# Altium PCB PCB_Altium_OpenComs_ABP1_Back-panel_Jacks_2023-05-12.pcbdoc
Units mm, origin at the board's own origin, x right, y up, seen from the top; angles counter-clockwise.
Board outline 48.96 x 57.85 mm, 2 copper layers (Top Layer, Bottom Layer); 2 components, 11 nets, 20 pads, 4 vias.
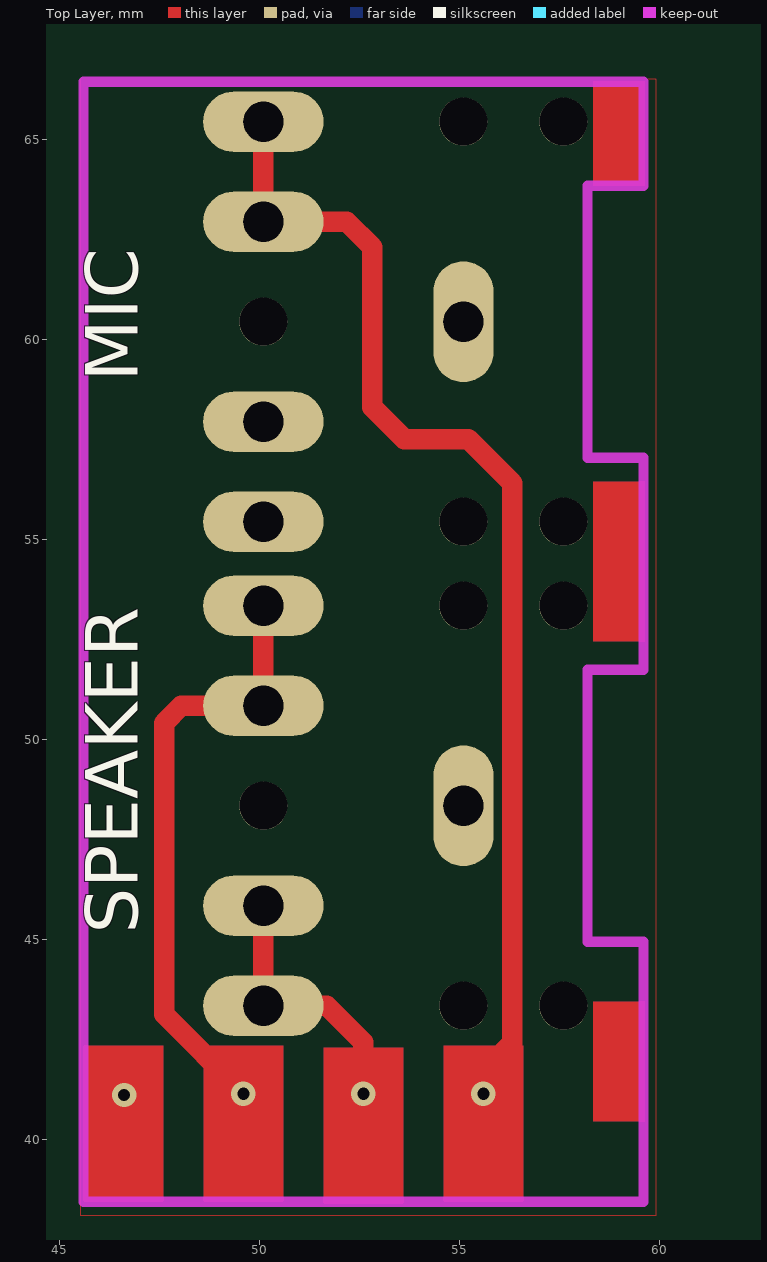
[diagram p0: Top Layer view]
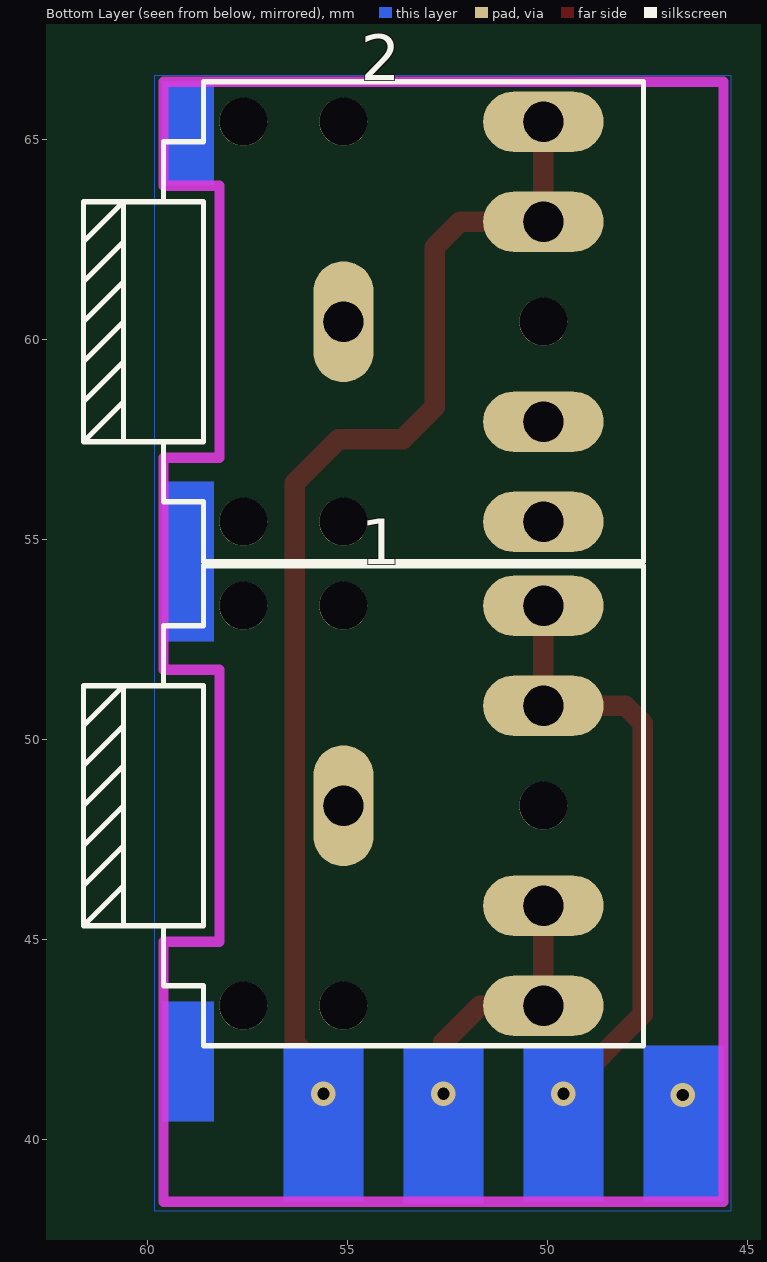
[diagram p1: Bottom Layer view, seen from below]

## Layer stack, top to bottom
Top Layer: signal copper (thickness not stored)
Dielectric: dielectric 0.32, FR-4, Dk 4.8
Bottom Layer: signal copper (thickness not stored)

## Board outline
74.364,25.4 25.4,25.4 25.4,83.249 74.364,83.249

## Components (designator, comment, footprint, x,y, rotation, side; value= is the part's Value field where it differs from the comment)
1 "FC68131" FC68131-5P 50.1,48.333 r0 bottom
2 "FC68131" FC68131-5P 50.1,60.433 r0 bottom

## Footprints (in the part's own frame and the unit in brackets; to place one, negate y for a bottom-side part, rotate by r counter-clockwise, add the part's x,y. Pads: shape width x height; smd on the part's side, far side on the other; paste and mask are expansions set on the pad)
FC68131-5P [mm]
  oval 1.508x3.016 hole 1: 1(5,0)
  oval 3.016x1.508 hole 1: 2(0,5) 3(0,2.5) 4(0,-2.5) 5(0,-5)
  round 1.2 hole 1.2 unplated: ""(0,0) ""(5,-5) ""(5,5) ""(7.5,-5) ""(7.5,5)
  silkscreen extent -2.5,-6 11.5,6

## Via types
v1: diameter 0.61, hole 0.305, Top Layer to Bottom Layer, tented both sides, 4 vias

## Nets (pads, with @x,y where several pads share a name; then routed paths per layer and width w, separated by ;. In a path a pad name is that pad's centre, name@x,y a point inside that pad or via, vN(x,y) a via of type N, cw(c..) or ccw(c..) an arc to the next point about the centre after c; other vN are vias at no path point)
2_2: 2.2
2_3: 2.3
BP_HP_L: 1.4 1.5 | length 15.2
  Top Layer w0.512: v1@49.599,41.132 47.618,43.116 47.618,50.401 48.05,50.832 1.4 ; 1.4 1.5
  other v1: 49.6,41.133
BP_HP_R: 1.2 1.3 | length 6.7
  Top Layer w0.512: 1.2 51.685,43.332 52.599,42.417 v1@52.599,41.132 ; 1.2 1.3
  other v1: 52.6,41.133
BP_MIC: 2.4 2.5 | length 29.3
  Top Layer w0.512: 2.4 52.185,62.933 52.817,62.3 52.817,58.3 53.617,57.5 55.218,57.5 56.318,56.4 56.318,42.4 55.599,41.683 v1@55.599,41.132 ; 2.4 2.5
  other v1: 55.6,41.133
GND: 1.1 2.1
  other v1: 46.618,41.1
HP_L: 
HP_R: 
MIC: 
S$44771: 
S$44781: 
pads on no net: 1. 2.

## Polygon pours and split planes (outlines as drawn)
GND on Bottom Layer (solid): 45.417,38.2 59.817,38.2 59.817,66.6 45.417,66.6
GND on Top Layer (solid): 45.518,38.1 59.917,38.1 59.917,66.5 45.518,66.5

## Other copper
Top Layer:
  rectangle net GND: 58.342,40.433 59.642,43.433
  rectangle net GND: 58.342,63.833 59.642,66.433
  rectangle net GND: 58.342,52.433 59.642,56.433
  rectangle net BP_HP_L: 48.6,38.433 50.6,42.333
  rectangle net GND: 45.6,38.433 47.6,42.333
  rectangle net BP_HP_R: 51.6,38.383 53.6,42.283
  rectangle net BP_MIC: 54.6,38.433 56.6,42.333
Bottom Layer:
  rectangle net BP_MIC: 54.6,38.433 56.6,42.333
  rectangle net BP_HP_R: 51.6,38.383 53.6,42.283
  rectangle net BP_HP_L: 48.6,38.433 50.6,42.333
  rectangle net GND: 45.6,38.433 47.6,42.333
  rectangle net GND: 58.342,40.433 59.642,43.433
  rectangle net GND: 58.342,52.433 59.642,56.433
  rectangle net GND: 58.342,63.833 59.642,66.433

## Silkscreen, mask and mechanical layers (free items; w line width, h text height)
Top Overlay:
  text "MIC" at 47.4,58.933 h2.25 r90
  text "SPEAKER" at 47.4,45.133 h2.25 r90
Top Solder:
  rectangle net GND: 58.291,40.382 59.692,43.483
  rectangle net GND: 58.291,63.782 59.692,66.483
  rectangle net GND: 58.291,52.382 59.692,56.483
  rectangle net MIC: 54.549,38.382 56.651,42.383
  rectangle net HP_R: 51.549,38.332 53.651,42.334
  rectangle net HP_L: 48.549,38.382 50.651,42.383
  rectangle net GND: 45.549,38.382 47.651,42.383
Bottom Solder:
  rectangle net GND: 45.575,38.349 47.676,42.351
  rectangle net HP_L: 48.575,38.349 50.676,42.351
  rectangle net HP_R: 51.575,38.299 53.677,42.301
  rectangle net MIC: 54.575,38.349 56.676,42.351
  rectangle net GND: 58.317,63.749 59.718,66.451
  rectangle net GND: 58.317,52.349 59.718,56.451
  rectangle net GND: 58.317,40.349 59.718,43.451
Document:
  region: 45.6,38.724 45.6,40.324 59.6,40.333 59.6,38.733